# Altium PCB TAUV-Powerboard.PcbDoc (part 2 of 2)
Units mil, origin at the board's own origin, x right, y up, seen from the top; angles counter-clockwise.
Board outline 4160 x 2875 mil, 4 copper layers (Component Side, Ground Plane, Power Plane, Solder Side), stack 33.234 mil thick; 127 components, 71 nets, 369 pads, 185 vias.
Unrouted connection lines stored in the file: 125.
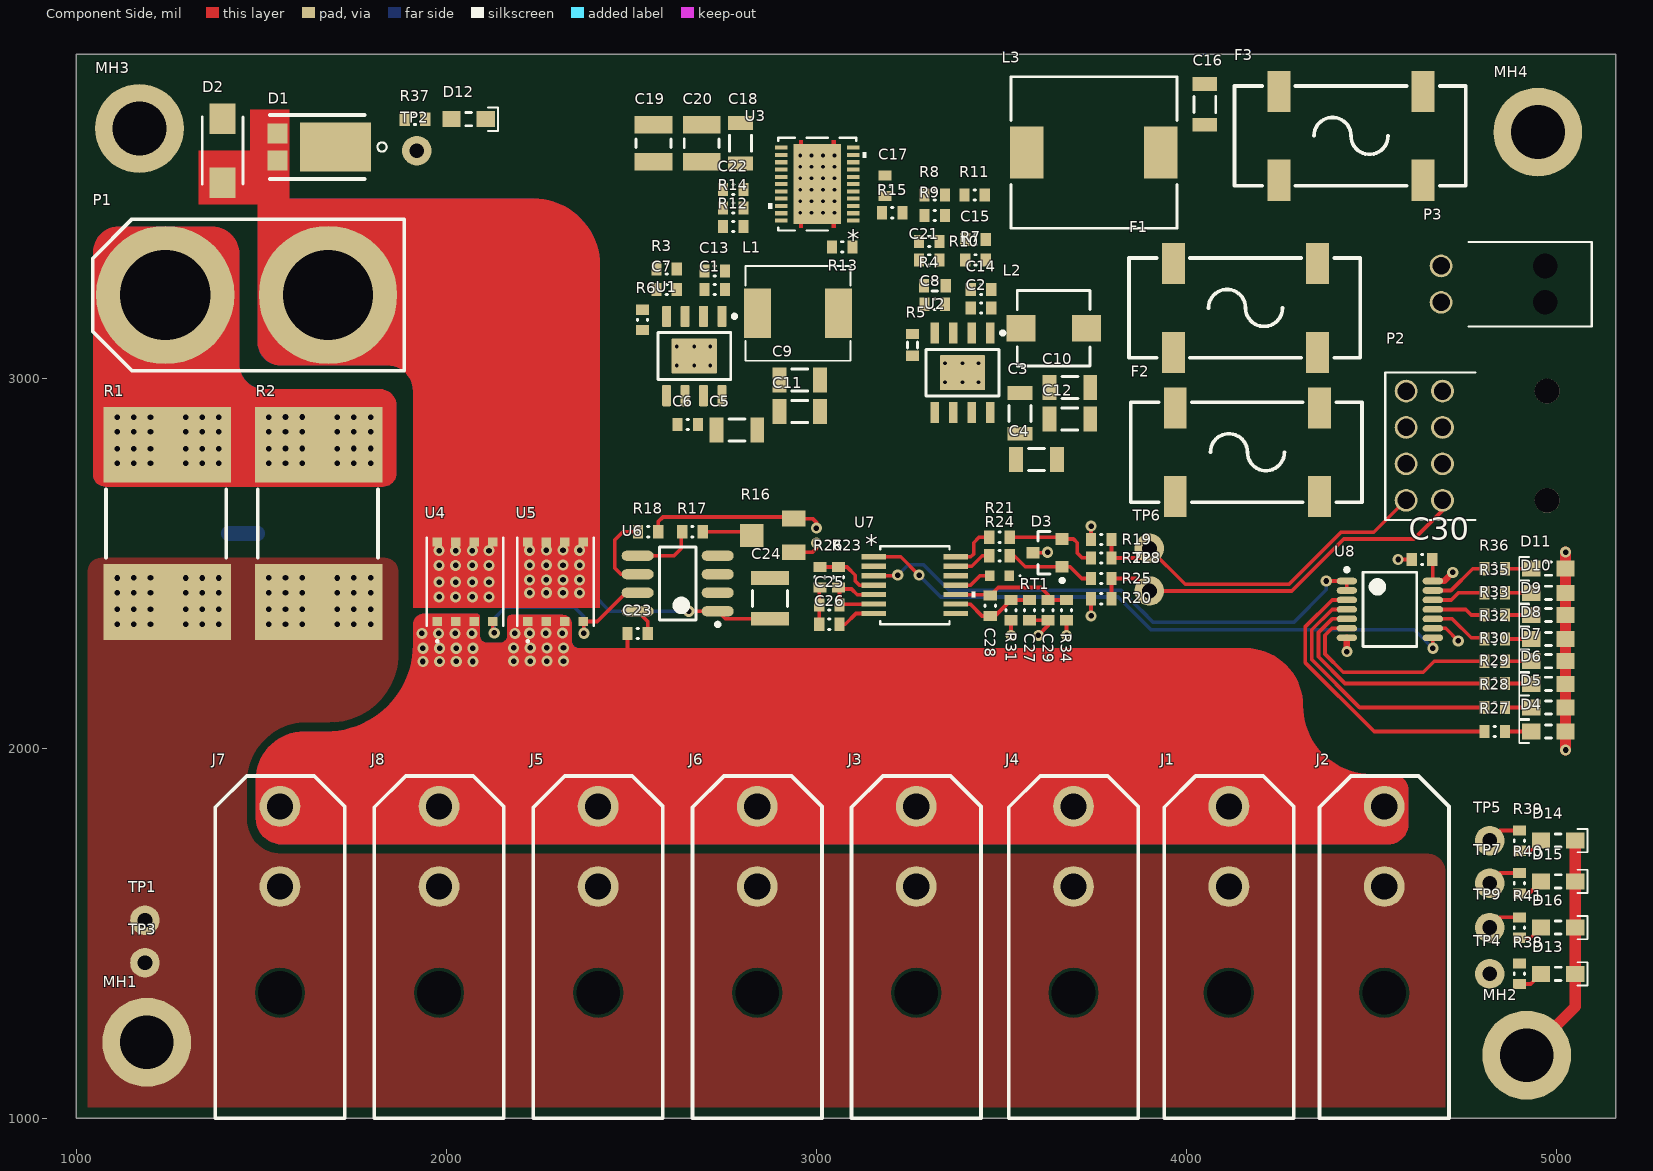
[diagram p0: Component Side view]

## Other copper (continued)
Component Side: (continued)
  region net VBAT_THRUSTERS: 1939.32,2363.73 2081.27,2363.73 cw(c2081.27,2355) 2090,2355 2090,2305 ccw(c2110,2305) 2110,2285 2145,2285 ccw(c2145,2305) 2165,2305 2165,2350 cw(c2174.99,2350) 2175,2360 2315,2360 cw(c2315,2336.1) 2338.9,2336.1 2338.9,2290.08 ccw(c2358.98,2290.08) 2358.98,2270 4160,2270 cw(c4160,2115) 4315,2115 ccw(c4500,2115) 4500,1930 4555,1930 cw(c4555,1885) 4600,1885 4600,1795 cw(c4545,1795) 4545,1740 1555,1740 cw(c1555,1810) 1485,1810 1485,1915 cw(c1615,1915) 1615,2045 1675,2045 ccw(c1675,2280) 1910,2280 1910,2334.41 cw(c1939.32,2334.41)
  region net RSENSE-: 1240,3410 1365.53,3410 cw(c1365.53,3335.53) 1440,3335.53 1440,3038 ccw(c1508,3038) 1508,2970 1820.97,2970 cw(c1820.97,2925.97) 1865,2925.97 1865,2743.57 cw(c1828.63,2743.57) 1828.63,2707.2 1077.8,2707.2 cw(c1077.8,2740) 1045,2740 1045,3340 cw(c1115,3340) 1115,3410
  region net VBAT: 1490,3470 1330,3470 1330,3615 1470,3615 1470,3725 1575,3725 1575,3485.31 2234.68,3485.31 cw(c2234.69,3305) 2415,3305 2415,2380 2166.52,2380 1910,2380 1910,2965 ccw(c1840.59,2965) 1840.59,3034.41 1552.34,3034.41 cw(c1552.34,3096.75) 1490,3096.75
Solder Side:
  region net RSENSE-: 1115,3410 1365,3410 cw(c1365,3335) 1440,3335 1440,3040 ccw(c1510,3040) 1510,2970 1820,2970 cw(c1820,2925) 1865,2925 1865,2744.03 cw(c1828.18,2744.03) 1828.17,2707.2 1077.8,2707.2 cw(c1077.8,2740) 1045,2740 1045,3340 cw(c1115,3340)
  region net VBAT: 1560.9,3485.9 2234.09,3485.91 cw(c2234.09,3305) 2415,3305 2410,2401.78 2134.57,2401.78 2126.35,2380.59 1910,2380.59 1910,2965 ccw(c1840,2965) 1840,3035 1550,3035 cw(c1550,3095) 1490,3095 1490,3415 cw(c1560.9,3415)
  region net VBAT_THRUSTERS: 1940.12,2363.73 2081.27,2363.73 cw(c2081.27,2355) 2090,2355 2090,2305 ccw(c2110,2305) 2110,2285 2145,2285 ccw(c2145,2305) 2165,2305 2165,2350 cw(c2175,2350) 2175,2360 2315,2360 cw(c2315,2336.1) 2338.9,2336.1 2338.9,2291.1 ccw(c2360,2291.1) 2360,2270 4160,2270 cw(c4160,2115) 4315,2115 ccw(c4500,2115) 4500,1930 4555,1930 cw(c4555,1885) 4600,1885 4600,1795 cw(c4545,1795) 4545,1740 1555,1740 cw(c1555,1810) 1485,1810 1485,1914.39 cw(c1615.61,1914.39) 1615.61,2045 1675,2045 ccw(c1675,2280) 1910,2280 1910,2333.61 cw(c1940.12,2333.61)

## Text inside footprints (layer, text, board x,y; h text height)
U3: Top Overlay "*" at 3117.44,3421.34 h50 r180; Mechanical 13 "*" at 3105.33,3465.24 h50 r180
U7: Top Overlay "*" at 3132.5,2526.27 h50; Mechanical 13 "*" at 3180,2488 h50